# Altium PCB 3matline.PcbDoc
Units mm, origin at the board's own origin, x right, y up, seen from the top; angles counter-clockwise.
Board outline 47.24 x 14.73 mm, 2 copper layers (Top Layer, Bottom Layer); 12 components, 9 nets, 38 pads, 7 vias.
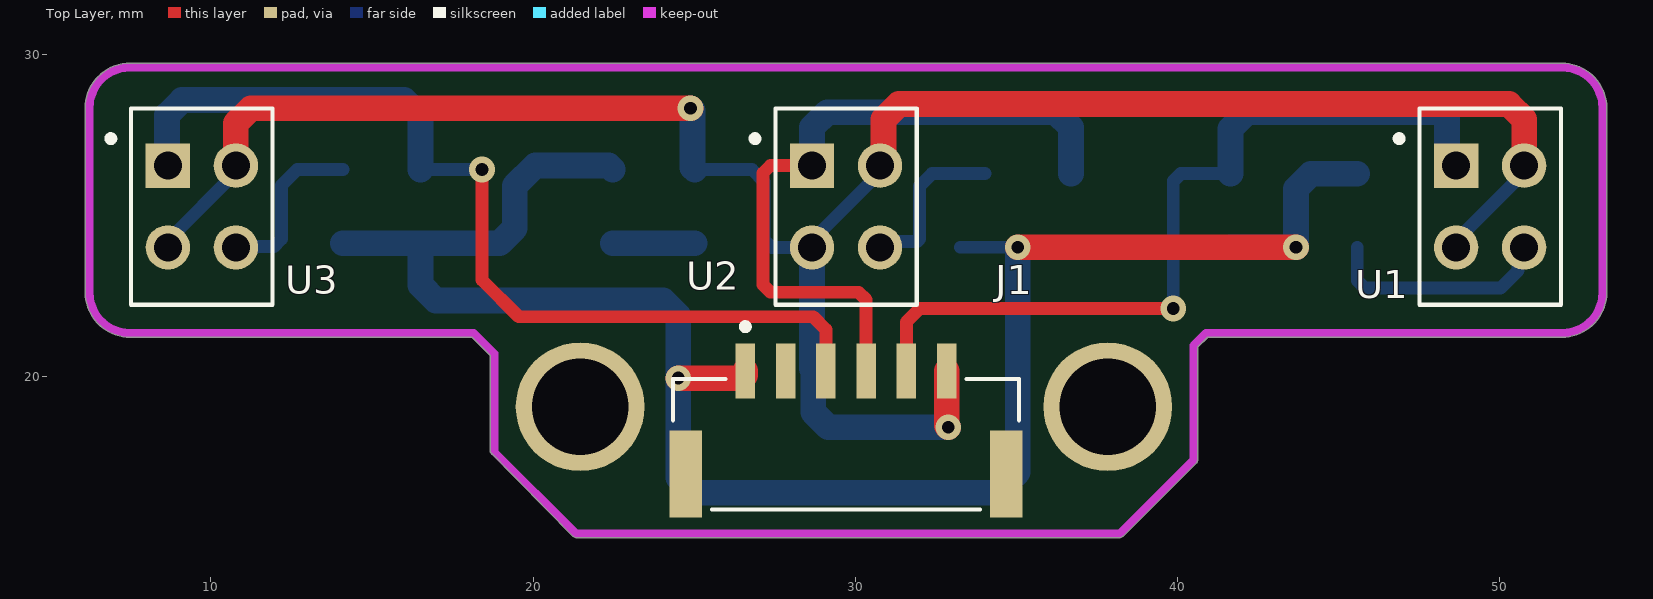
[diagram p0: Top Layer view]
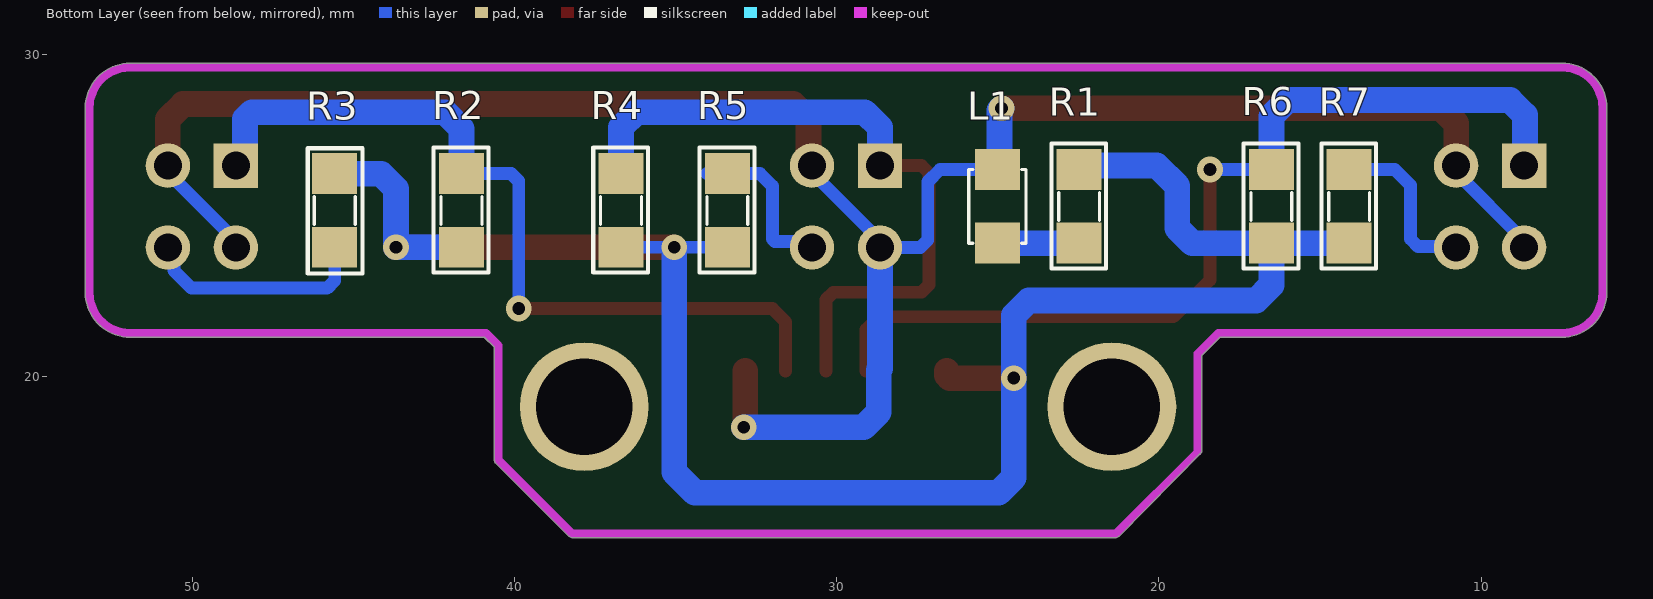
[diagram p1: Bottom Layer view, seen from below]
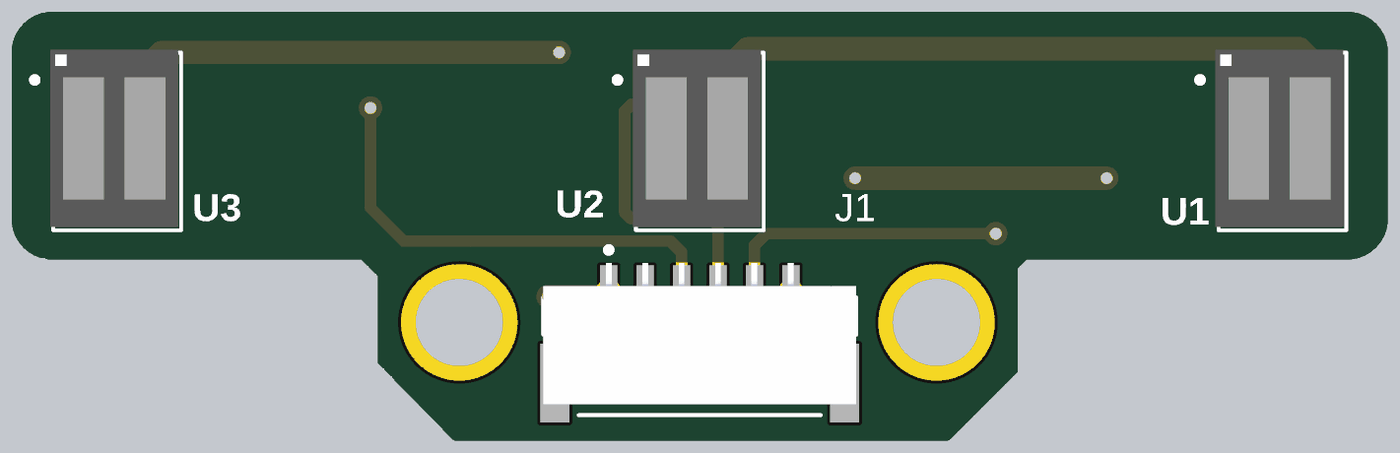
[diagram p2: 3D render of the assembled board from above, using the file's embedded part models]
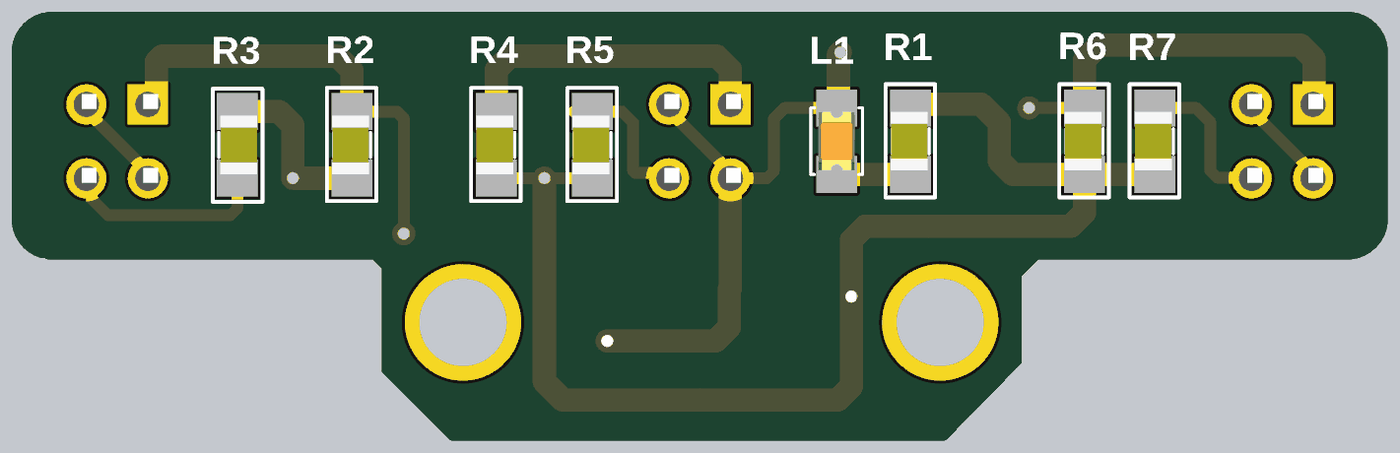
[diagram p3: 3D render of the assembled board from below, using the file's embedded part models]

## Layer stack, top to bottom
Top Solder: solder mask 0.0102, Solder Resist, Dk 3.5
Top Layer: signal copper 0.0356
Dielectric 1: dielectric 0.32, FR-4, Dk 4.8
Bottom Layer: signal copper 0.0356
Bottom Solder: solder mask 0.0102, Solder Resist, Dk 3.5

## Board outline
18.669,17.653 18.669,20.648 18.108,21.209 7.493,21.209 cw(c7.493,22.606) 6.096,22.606 6.096,28.321 cw(c7.493,28.321) 7.492,29.718 7.493,29.718 50.673,29.718 51.943,29.718 cw(c51.943,28.321) 53.34,28.321 53.34,22.606 cw(c51.943,22.606) 51.943,21.209 40.947,21.209 40.64,20.902 40.64,17.399 40.603,17.309 38.317,15.023 38.227,14.986 21.336,14.986 21.246,15.023

## Design rules (kind name [scope] priority, off if disabled: settings)
Clearance [All] p1: gap=0.254 ignorepadtopadclearanceinfootprint=FALSE except(0: Arc-Hole Track-Hole SMDPad-Hole THPad-Hole Via-Hole Fill-Hole Poly-Hole Region-Hole Text-Hole)
PolygonConnect [All] p1: connectstyle=Relief reliefconductorwidth=0.254 reliefentries=4 polygonreliefangle="90 Angle" airgapwidth=0.254
RoutingVias [All] p1: holewidth=0.4 width=0.8 viastyle="Through Hole" minholewidth=0.4 minwidth=0.8 maxholewidth=0.4 maxwidth=0.8
SolderMaskExpansion [All] p1: expansion=0.102 istentingtop=FALSE
Width [All] p1: maxlimit=0.8 minlimit=0.4 preferedwidth=0.5
30 further rules are at their usual default settings.

## Classes and differential pairs
component class 3mat: J1 L1 R1 R2 R3 R4 R5 R6 R7 U1 U2

## Components (designator, comment, footprint, x,y, rotation, side; value= is the part's Value field where it differs from the comment)
J1 "SM06B-GHS-TB" JST_SM06B-GHS-TB 29.718,18.288 r0 top (schematic designator J?)
L1 "LED 0805" LED-0805-Orange 25.019,24.13 r90 bottom
R1 "1k" SM-0805 22.479,25.273 r270 bottom value=1K
R2 "100" SM-0805 41.656,25.146 r270 bottom value=1K
R3 "10k" SM-0805 45.593,25.146 r90 bottom value=1K
R4 "100" SM-0805 36.703,25.146 r270 bottom value=1K
R5 "10k" SM-0805 33.401,25.146 r270 bottom value=1K
R6 "100" SM-0805 16.51,25.273 r270 bottom value=1K
R7 "10k" SM-0805 14.097,25.273 r270 bottom value=1K
U1 "QRD1114" ONS_QRD1114 49.619,25.367 r0 top
U2 "QRD1114" ONS_QRD1114 29.619,25.367 r0 top
U3 "QRD1114" ONS_QRD1114 9.619,25.367 r0 top

## Footprints (in the part's own frame and the unit in brackets; to place one, negate y for a bottom-side part, rotate by r counter-clockwise, add the part's x,y. Pads: shape width x height; smd on the part's side, far side on the other; paste and mask are expansions set on the pad)
JST_SM06B-GHS-TB [mm]
  rect 0.6x1.7 smd paste+0 mask+0.102: 1(-3.125,1.875) 2(-1.875,1.875) 3(-0.625,1.875) 4(0.625,1.875) 5(1.875,1.875) 6(3.125,1.875)
  rect 1x2.7 smd paste+0 mask+0.102: MP1(-4.975,-1.325) MP2(4.975,-1.325)
  silkscreen extent -5.38,-2.42 5.38,3.35, body extent -5.38,-2.05 5.38,2.8, height 4.25
LED-0805-Orange [mil]
  rect 50x55 smd: 1(0,0) 2(90,0)
  silkscreen extent 0,-35 90,35, body extent 5,-25 85,25, height 43
ONS_QRD1114 [mm]
  rect 1.378x1.378 / inner round 1.378 / far side rect 1.378x1.378 hole 0.87: 1(-0.955,1.17)
  round 1.378 hole 0.87: 2(-0.955,-1.37) 3(1.155,-1.37) 4(1.155,1.17)
  silkscreen extent -2.83,-3.15 2.29,2.95, body extent -2.2,-3.05 2.2,3.05, height 4.65
SM-0805 [mil] "Compoment SMD 80x50mil"
  rect 50x55 smd: 1(-45,0) 2(45,0)
  silkscreen extent -77,-34 76,33, body extent -40,-27 40,23, height 24

## Part data
J1: "Connector Header Surface Mount, Right Angle 6 position 0.049 (1.25mm)", Package=None, Check_prices=https://www.snapeda.com/parts/SM06B-GHS-TB/JST/view-part/?ref=eda, MF="JST Sales", MP=SM06B-GHS-TB, SnapEDA_Link=https://www.snapeda.com/parts/SM06B-GHS-TB/JST/view-part/?ref=snap
L1: library part "LED 0805 Cam", "Dán", Chung_Loai=Dán, Don_Vi=Con, Ma_Hang=MH002328, Ten_Linh_Kien="LED 0805 Màu Cam ( Orange)"
R1 R2 R3 R4 R5 R6 R7: library part RM, "Resistor SMD"
U1 U2 U3: "Reflective Optical Sensor 0.050 (1.27mm) Radial - 4 Leads", Package="NON-STANDARD-4 ON Semiconductor", Check_prices=https://www.snapeda.com/parts/QRD1114/Onsemi/view-part/?ref=eda, MF=onsemi, MP=QRD1114, SnapEDA_Link=https://www.snapeda.com/parts/QRD1114/Onsemi/view-part/?ref=snap

## Free pads (board coordinates)
  round 4 hole 3: 2(21.463,19.05) 2(37.846,19.05)

## Via types
v1: diameter 0.8, hole 0.4, Top Layer to Bottom Layer, tented both sides, 7 vias

## Nets (pads, with @x,y where several pads share a name; then routed paths per layer and width w, separated by ;. In a path a pad name is that pad's centre, name@x,y a point inside that pad or via, vN(x,y) a via of type N, cw(c..) or ccw(c..) an arc to the next point about the centre after c; other vN are vias at no path point)
+12: J1.1 R1.1 R2.2 R3.2 R4.2 R5.2 R6.2 R7.2 | length 63.1
  Top Layer w0.8: v1(24.511,19.939) 26.493,19.939 26.593,20.039 J1.1 ; v1(35.052,24.003) v1(43.688,24.003)
  Bottom Layer w0.4: R5.2@33.274,24.003 R5.2 v1(35.052,24.003) ; v1@35.052,23.876 35.179,24.003 R4.2
  Bottom Layer w0.8: R7.2 R6.2 ; R1.1 22.352,26.543 20.066,26.543 19.431,25.908 19.431,24.599 18.962,24.13 R6.2 ; v1@35.052,23.876 35.052,17.018 34.417,16.383 24.98,16.383 24.511,16.852 v1(24.511,19.939) 24.511,21.883 24.042,22.352 16.979,22.352 16.51,22.821 R6.2 ; R2.2 v1(43.688,24.003) 43.688,25.82 44.157,26.289 R3.2
A0: J1.5 R2.1 U1.1 | length 25.8
  Top Layer w0.4: J1.5 31.593,21.687 32.004,22.098 v1(39.878,22.098)
  Bottom Layer w0.4: v1(39.878,22.098) 39.878,26.055 40.112,26.289 R2.1
  Bottom Layer w0.8: R2.1 41.656,27.686 42.164,28.194 48.172,28.194 48.375,27.991 48.375,26.826 U1.1
A1: J1.4 R4.1 U2.1 | length 21.7
  Top Layer w0.4: U2.1 28.658,26.543 27.375,26.543 27.141,26.309 27.141,22.84 27.375,22.606 30.109,22.606 30.343,22.372 J1.4
  Bottom Layer w0.8: U2.1 28.664,27.725 29.133,28.194 36.234,28.194 36.703,27.725 R4.1
A2: J1.3 R6.1 U3.1 | length 29.4
  Top Layer w0.4: v1(18.415,26.416) 18.415,22.987 19.558,21.844 28.702,21.844 29.093,21.453 J1.3
  Bottom Layer w0.4: R6.1 v1(18.415,26.416)
  Bottom Layer w0.8: U3.1 8.664,26.798 8.636,26.826 8.636,28.106 9.105,28.575 16.002,28.575 16.51,28.067 R6.1
GND: J1.6 L1.2 U1.2 U1.4 U2.2 U2.4 U3.2 U3.4 | length 68.1
  Top Layer w0.8: U3.4 10.774,27.852 11.243,28.321 v1(24.892,28.321) ; U2.4 30.885,26.648 30.885,27.979 31.353,28.448 50.305,28.448 50.774,27.979 U1.4 ; J1.6 32.843,18.465 v1(32.893,18.415)
  Bottom Layer w0.4: U3.2 8.664,24.212 10.774,26.322 U3.4 ; L1.2 26.797,26.416 27.178,26.035 27.178,24.231 27.412,23.997 U2.2 28.664,24.212 30.774,26.322 U2.4 ; U1.2 48.664,24.212 50.774,26.322 U1.4 U1.4@50.8,26.563
  Bottom Layer w0.8: v1(24.892,28.321) 24.956,28.258 24.956,26.479 L1.2 ; U2.2 28.664,20.231 28.702,20.193 28.702,18.884 29.171,18.415 v1(32.893,18.415)
NetL1_1: L1.1 R1.2 | length 2.5
  Bottom Layer w0.8: R1.2 L1.1
NetR3_1: R3.1 U1.3 | length 7.1
  Bottom Layer w0.4: R3.1 45.593,22.967 45.827,22.733 50.038,22.733 50.587,23.282 50.587,23.81 U1.3
NetR5_1: R5.1 U2.3 | length 5.2
  Bottom Layer w0.4: U2.3 30.961,24.184 31.931,24.184 32.004,24.257 32.004,25.908 32.385,26.289 R5.1@34.036,26.289
NetR7_1: R7.1 U3.3 | length 5.3
  Bottom Layer w0.4: U3.3 10.8,24.023 11.958,24.023 12.192,24.257 12.192,25.928 12.68,26.416 R7.1
pads on no net: J1.2 J1.MP1 J1.MP2

## Keep-outs
Keep-Out Layer:
  lines w0.254: 50.8,21.336 51.943,21.336 ccw(c51.943,22.606) 53.213,22.606 53.213,23.495 53.213,27.795 53.213,28.321 ccw(c51.943,28.321) 51.943,29.591 50.673,29.591 7.493,29.591 ccw(c7.493,28.321) 6.223,28.321 6.223,27.751 6.223,23.241 6.223,22.606 ccw(c7.493,22.606) 7.493,21.336 9.017,21.336 18.161,21.336 18.796,20.701 18.796,17.653 21.336,15.113 38.227,15.113 40.513,17.399 40.513,20.955 40.894,21.336 51.417,21.336